# EAGLE board relay_brd (EAGLE 9.7.0)
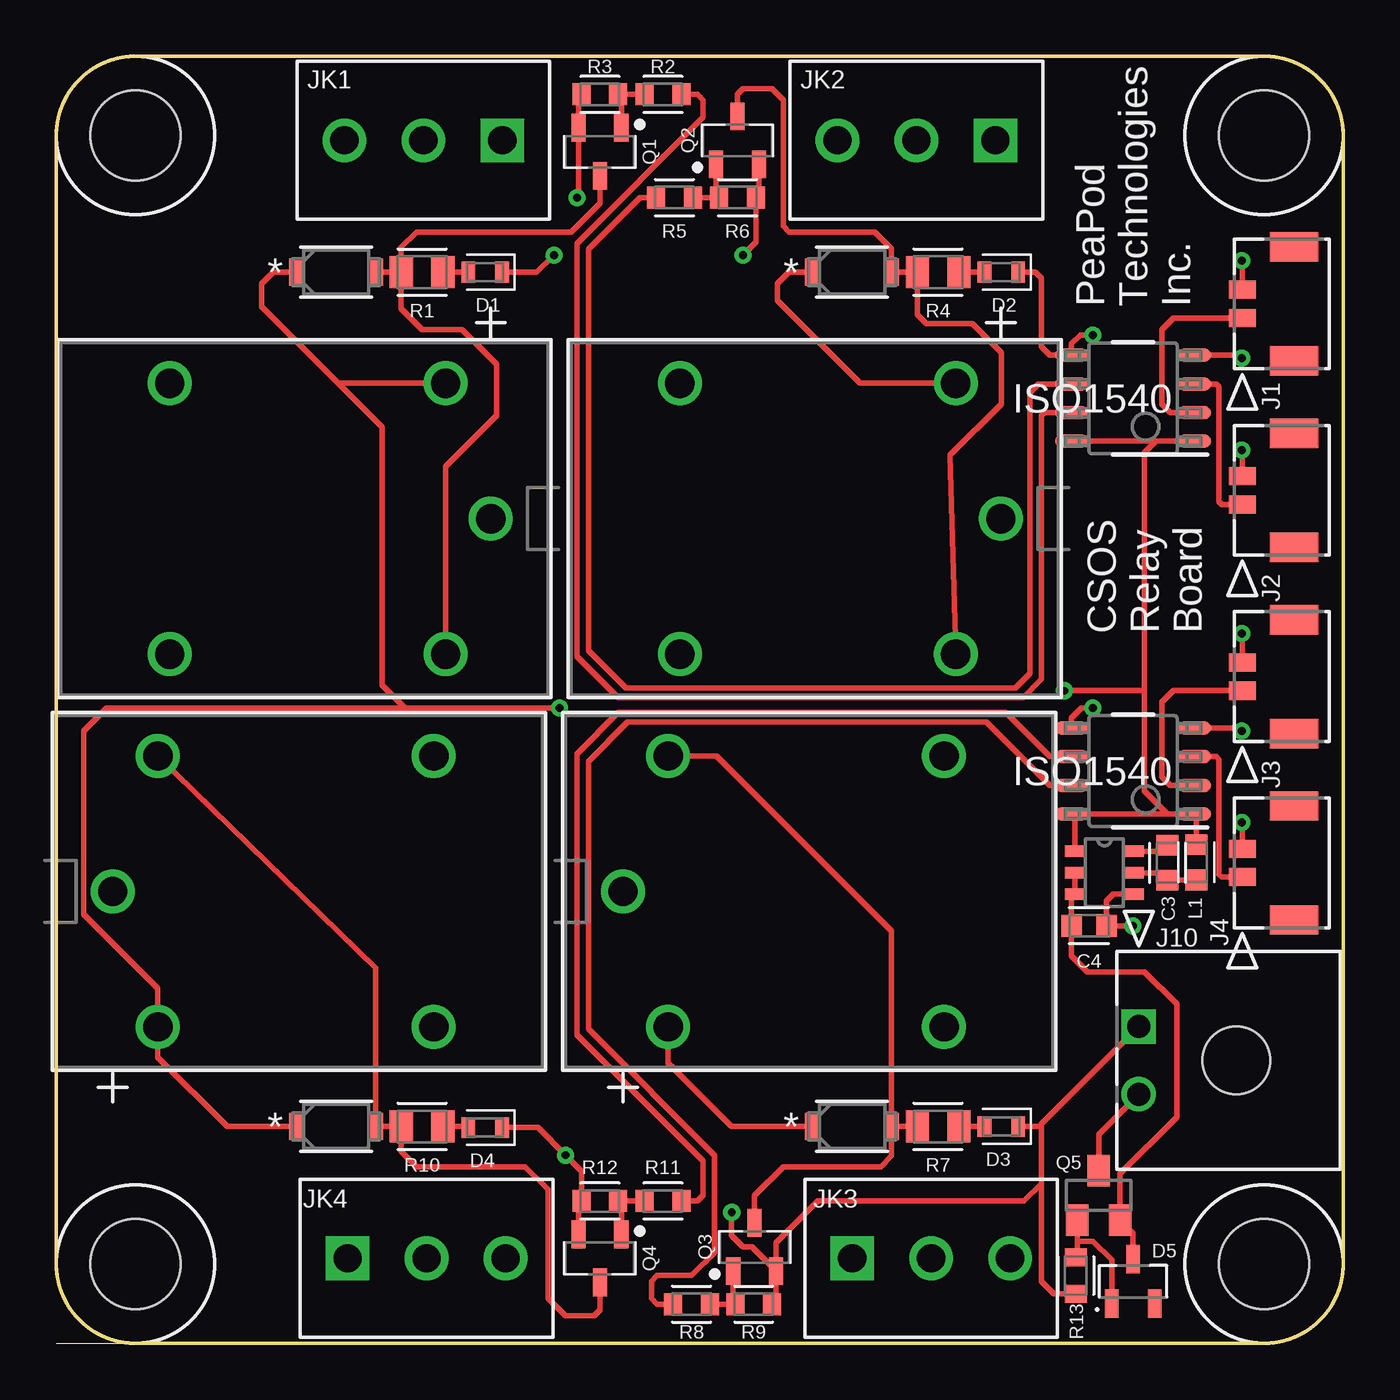
[diagram p0: board, top side]
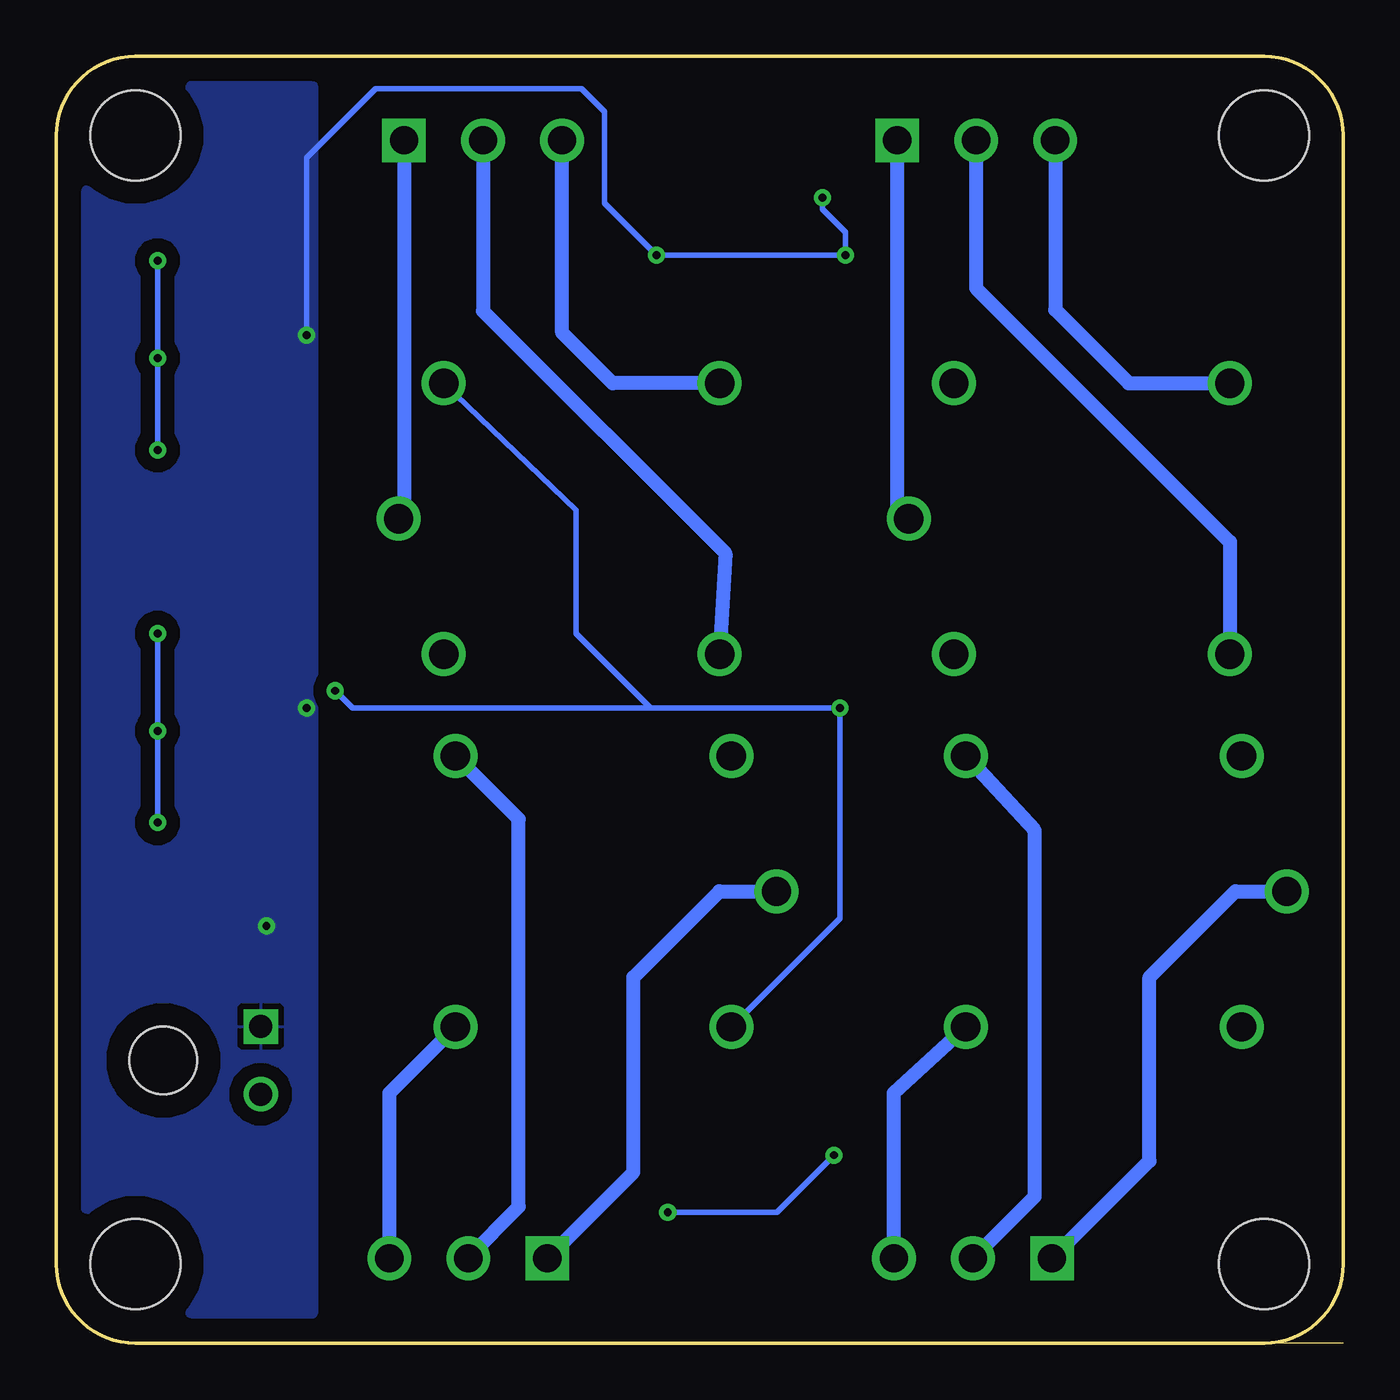
[diagram p1: board, bottom side, seen from below]

Size 57 x 57 mm. Coordinates in mm from the lower left corner, seen from the top.
Outline: 0,0 3.5,0
Outline: 53.5,57 18.48,57
Outline: 53.5,57 3.5,57 arc90 0,53.5 0,3.5 arc90 3.5,0
Outline: 53.5,57 arc-90 57,53.5 57,3.5 arc-90 53.5,0 3.5,0
Copper layers (1*16): Top / Bottom
Stack-up Default Layer Stack: Top User Defined 0.035mm / Dielectric-1 User Defined 1.5mm / Bottom User Defined 0.035mm
Design rules: minimum drill size 0.35mm, minimum copper width 6mil, keepout clearance 0mil, drill distance 6mil, dimension clearance 40mil, restrict clearance 0mil, copper clearance wire_polygon to wire_polygon 6mil, copper clearance wire_polygon to pad_smd 6mil, copper clearance wire_polygon to via 6mil, copper clearance pad_smd to pad_smd 6mil, copper clearance pad_smd to via 6mil, copper clearance via to via 6mil, copper clearance smd to pad (same net) 6mil, copper clearance smd to via (same net) 6mil, copper clearance smd to smd (same net) 6mil
Holes 4 mm at 3.5,3.5 3.5,53.5 53.5,53.5 53.5,3.5

## Footprints (pad centres in the part's own frame; a part is rotated, then mirrored left to right if it is on the bottom)
CAPC1608X85 = smd 0.921 x 0.97: 1 -0.775,0; 2 0.775,0
LEDC1608X55N_FLAT-R = smd 0.612 x 0.912: A 0.75,0; C -0.75,0
SOT95P230X110-3N = smd 0.59 x 1.26: 1 -0.95,-0.98; 2 0.95,-0.98; 3 0,0.98
CR_SOD-123FL_SME-L = smd 0.66 x 1.194: 1 -1.753,0; 2 1.753,0
2PIN = smd 0.8 x 1.2: 1 0,0; 2 -1.25,0 | smd 1.3 x 2.15: 3 1.9,2.295; 4 -3.15,2.295
2PIN' = drill 1.02 pad 1.52 square: 1 0,0 | drill 1.02 pad 1.52: 2 -3,0 | hole 2.997: -1.499,-4.318
TERM-3,5MM = drill 1.25 pad 1.93 square: P$1 0,0 | drill 1.25 pad 1.93: P$2 0,-3.5; P$3 0,-7
RELAY_G5LE-1_DC5_OMR = drill 1.3 pad 1.808: 1 0,16.5; 2 -6,14.5; 3 -6,2.278; 4 6,2.278; 5 6,14.5
INDC1608X95N = smd 0.9 x 0.97: 1 -0.785,0 | smd 0.933 x 0.97: 2 0.769,0
SOT95P237X112-3N = smd 1.224 x 0.625: 1 -1.064,0.95; 2 -1.064,-0.95; 3 1.064,0
SOT23 = smd 1 x 1.4: 1 -0.95,-1.1; 2 0.95,-1.1; 3 0,1.1
RESC2012X65 = smd 1.031 x 1.42: 1 -0.919,0; 2 0.919,0
RESC1608X60 = smd 0.799 x 0.974: 1 -0.815,0; 2 0.815,0
SOIC-8 = smd 1.45 x 0.6: 1 -2.725,1.905; 2 -2.725,0.635; 3 -2.725,-0.635; 4 -2.725,-1.905; 5 2.725,-1.905; 6 2.725,-0.635; 7 2.725,0.635; 8 2.725,1.905
AP63205 = smd 0.902 x 0.508: 1 -1.302,0.95; 2 -1.302,0; 3 -1.302,-0.95; 4 1.302,-0.95; 5 1.302,0; 6 1.302,0.95

## Placement (x,y rotation side)
C3  0.1uF  [CAPC1608X85]  49.22,21.28 90 top
C4  10uF  [CAPC1608X85]  45.75,18.49 0 top
D1  LED_RED  [LEDC1608X55N_FLAT-R]  18.99,47.44 180 top
D2  LED_RED  [LEDC1608X55N_FLAT-R]  41.85,47.44 180 top
D3  LED_RED  [LEDC1608X55N_FLAT-R]  41.85,9.6 180 top
D4  LED_RED  [LEDC1608X55N_FLAT-R]  18.99,9.55 180 top
D5  PLVA650A,215  [SOT95P230X110-3N]  47.7,2.74 0 top
FD1  1N4007FLCR  [CR_SOD-123FL_SME-L]  12.39,47.44 0 top
FD2  1N4007FLCR_SOD-123FL_SME-L  [CR_SOD-123FL_SME-L]  35.25,47.44 0 top
FD3  1N4007FLCR_SOD-123FL_SME-L  [CR_SOD-123FL_SME-L]  35.25,9.6 0 top
FD4  1N4007FLCR_SOD-123FL_SME-L  [CR_SOD-123FL_SME-L]  12.39,9.6 0 top
J1  [2PIN]  52.54,45.41 270 top
J2  [2PIN]  52.54,37.16 270 top
J3  [2PIN]  52.54,28.9 270 top
J4  [2PIN]  52.54,20.64 270 top
J10  VIN  [2PIN']  47.95,14.02 90 top
JK1  Relay 1  [TERM-3,5MM]  19.76,53.28 270 top
JK2  Relay 2  [TERM-3,5MM]  41.6,53.28 270 top
JK3  Relay 3  [TERM-3,5MM]  35.25,3.75 90 top
JK4  Relay 4  [TERM-3,5MM]  12.9,3.75 90 top
K1  G5LE-14_DC12RELAY_G5LE-1_DC5_OMR  [RELAY_G5LE-1_DC5_OMR]  2.74,36.52 270 top
K2  G5LE-15_DC5  [RELAY_G5LE-1_DC5_OMR]  25.34,36.52 270 top
K3  G5LE-14_DC12RELAY_G5LE-1_DC5_OMR  [RELAY_G5LE-1_DC5_OMR]  41.6,20.01 90 top
K4  G5LE-14_DC12RELAY_G5LE-1_DC5_OMR  [RELAY_G5LE-1_DC5_OMR]  18.99,20.01 90 top
L1  4.7uH  [INDC1608X95N]  50.49,21.29 270 top
Q1  MMBT2222A-7-F  [SOT95P237X112-3N]  24.07,52.78 270 top
Q2  NPN  [SOT95P237X112-3N]  30.17,53.28 90 top
Q3  NPN  [SOT95P237X112-3N]  30.93,4.26 90 top
Q4  NPN  [SOT95P237X112-3N]  24.07,3.75 270 top
Q5  SI01P10-TP  [SOT23]  46.17,6.55 0 top
R1  10k  [RESC2012X65]  16.2,47.44 180 top
R2  1k  [RESC1608X60]  26.87,55.32 0 top
R3  10k  [RESC1608X60]  24.07,55.32 0 top
R4  10k  [RESC2012X65]  39.06,47.44 180 top
R5  1k  [RESC1608X60]  27.38,50.74 180 top
R6  10k  [RESC1608X60]  30.17,50.74 180 top
R7  10k  [RESC2012X65]  39.06,9.6 180 top
R8  1k  [RESC1608X60]  28.14,1.72 180 top
R9  10k  [RESC1608X60]  30.89,1.72 180 top
R10  10k  [RESC2012X65]  16.2,9.6 180 top
R11  1k  [RESC1608X60]  26.87,6.29 0 top
R12  10k  [RESC1608X60]  24.07,6.29 0 top
R13  10k  [RESC1608X60]  45.16,2.99 90 top
U1  ISO1540  [SOIC-8]  47.7,41.85 180 top
U2  ISO1540  [SOIC-8]  47.7,25.34 180 top
U4  5V BUCK  [AP63205]  46.43,20.84 0 top

## Library data of the parts
C3 C4 = Capacitor; CATEGORY: Capacitor
D1-D4 = LED; CATEGORY: LED; COLOR: RED; DESCRIPTION: CHIP LED FLAT; SUB-CATEGORY: CHIP; TYPE: FLAT_TOP
D5 = PLVA650A_215; AVAILABILITY: Good; MF: NXP; MP: PLVA650A,215; PACKAGE: SOT95P230X110-3N; PRICE: $0.13 USD
FD1-FD4 = 2024-02-25_07-03-28_Library; COPYRIGHT: Copyright (C) 2024 Ultra Librarian. All rights reserved.; MANUFACTURER_PART_NUMBER: 1N4007FL; MFR_NAME: SMC Diode Solutions
J1-J4 = Molex Micro-Lock PLUS
J10 = Molex Micro-Fit; COPYRIGHT: Copyright (C) 2022 Ultra Librarian. All rights reserved.; MANUFACTURER_PART_NUMBER: 436500201; MFR_NAME: Molex Connector Corporation
JK1-JK4 = Screw Terminal (3.5mm)
K1-K4 = G5LE-14 DC3; COPYRIGHT: Copyright (C) 2022 Ultra Librarian. All rights reserved.; MANUFACTURER_PART_NUMBER: G5LE-14 DC12; MFR_NAME: Omron
L1 = Inductor; CATEGORY: Inductor; SUB-CATEGORY: Fixed
Q1-Q4 = Transistor; CATEGORY: Transistor; SUB-CATEGORY: BJT; TYPE: NPN
Q5 = Transistor; CATEGORY: Transistor; SUB-CATEGORY: MOSFET; TYPE: P-Channel
R1-R13 = Resistor; CATEGORY: Resistor; SUB-CATEGORY: Fixed
U1 U2 = ISO1540 I2C Isolator; COPYRIGHT: Copyright (C) 2022 Ultra Librarian. All rights reserved.; MANUFACTURER_PART_NUMBER: ISO1540DR; MFR_NAME: Texas Instruments; REFDES: RefDes; TYPE: TYPE
U4 = AP63205; COPYRIGHT: Copyright (C) 2022 Ultra Librarian. All rights reserved.; MANUFACTURER_PART_NUMBER: AP63205WU-7; MFR_NAME: Diodes Inc

## Nets
+5V: FD1.1 FD2.1 FD3.1 FD4.1 K1.2 K2.2 K3.2 K4.2 L1.1 U1.1 U1.8 U2.1 U2.8 U4.1
GND: C4.2 D1.C D2.C D3.C D4.C J10.1 Q1.2 Q2.2 Q3.2 Q4.2 R3.1 R6.1 R9.1 R12.1 R13.1 U1.5 U2.5 U4.4
N$1: JK1.P$3 K1.3
N$2: JK1.P$1 K1.1
N$3: JK1.P$2 K1.4
N$4: FD1.2 K1.5 Q1.3 R1.2
N$5: FD2.2 K2.5 Q2.3 R4.2
N$6: Q1.1 R2.1 R3.2
N$7: JK2.P$3 K2.3
N$8: R2.2 U1.7
N$9: J1.1 U1.2
N$10: J2.1 U1.3
N$11: J1.2 J2.2 U1.4
N$12: JK2.P$1 K2.1
N$13: FD4.2 K4.5 Q4.3 R10.2
N$14: FD3.2 K3.5 Q3.3 R7.2
N$15: Q2.1 R5.1 R6.2
N$16: JK2.P$2 K2.4
N$17: R5.2 U1.6
N$18: JK3.P$3 K3.3
N$19: JK3.P$1 K3.1
N$20: D2.A R4.1
N$21: D3.A R7.1
N$22: Q3.1 R8.1 R9.2
N$23: JK3.P$2 K3.4
N$24: J3.1 U2.2
N$25: R8.2 U2.7
N$26: J4.1 U2.3
N$27: J3.2 J4.2 U2.4
N$28: JK4.P$3 K4.3
N$29: JK4.P$1 K4.1
N$30: D1.A R1.1
N$31: D4.A R10.1
N$32: Q4.1 R11.1 R12.2
N$33: JK4.P$2 K4.4
N$34: R11.2 U2.6
N$36: C3.2 U4.6
N$37: C3.1 L1.2 U4.5
N$38: J10.2 Q5.3
N$39: C4.1 D5.3 Q5.2 U4.2 U4.3
N$40: D5.1 Q5.1 R13.2

## Tracks (layer width: path | path; a pad name or v marks a point on that pad's centre or on a via)
+5V  (via drill 0.35)
  Top 0.254: FD4.1 7.56,9.6 4.49,12.67 K4.2 4.49,15.71 1.22,18.99 1.22,27.12 2.24,28.14 15.44,28.14 | K3.2 27.1,12.41 29.92,9.6 FD3.1 | FD1.1 9.6,47.44 9.09,46.93 9.09,45.92 12.49,42.52 | 12.49,42.52 K1.2 | FD2.1 32.46,47.44 31.95,46.93 31.95,46.17 35.6,42.52 K2.2 | L1.1 50.49,23.37 U2.1 49.22,23.44 | U4.1 45.12,23.29 U2.8 49.22,23.44 | U1.8 48.71,39.95 | 48.71,39.95 U1.1 | 49.22,23.44 48.2,24.45 48.2,28.9 | 48.2,28.9 48.2,39.44 48.71,39.95 | 48.2,28.9 v44.65,28.9 | 15.44,28.14 v22.3,28.14 | 12.49,42.52 14.42,40.58 14.42,29.15 15.44,28.14
  Bottom 0.254: K3.2 22.3,18.81 v22.3,28.14 30.68,28.14 | K2.2 33.98,36.91 33.98,31.44 30.68,28.14 | v44.65,28.9 43.89,28.14 30.68,28.14
GND  (via drill 0.35)
  Top 0.254: D3.C 43.63,9.6 | D1.C 21.28,47.44 v22.04,48.2 | D4.C 21.33,9.55 v22.55,8.33 23.26,7.62 R12.1 23.12,6.16 Q4.2 23.26,4.95 | Q3.2 31.88,1.9 R9.1 | R3.1 23.12,55.18 Q1.2 23.12,50.81 v23.06,50.74 | Q2.2 31.12,50.88 R6.1 30.98,48.77 v30.42,48.2 | v45.92,44.65 45.35,44.65 44.97,44.27 U1.5 44.01,43.76 43.63,44.14 43.63,47.19 43.38,47.44 D2.C | U2.5 44.97,27.7 45.41,28.14 v45.92,28.14 | U4.4 46.81,19.89 46.52,19.6 C4.2 v47.7,18.49 | R13.1 44.19,2.18 43.63,2.74 43.63,7.06 | 43.63,7.06 43.63,9.6 | J10.1 43.63,9.7 43.63,9.6 | Q3.2 31.88,4.45 33.73,6.29 42.87,6.29 43.63,7.06 | Q3.2 30.82,4.26 30.42,4.26 29.92,4.77 v29.92,5.79
  Bottom 0.254: v29.92,5.79 25.09,5.79 v22.55,8.33 | v23.06,50.74 23.06,50.24 22.04,49.22 v22.04,48.2 v30.42,48.2 32.71,50.49 32.71,54.55 33.73,55.57 42.87,55.57 45.92,52.52 v45.92,44.65
  pour Bottom (isolate 0.61): 59.38,59.38 45.41,59.38 45.41,-4.12 59.38,-4.12 59.38,-1.58 59.38,-4.12
N$1
  Bottom 0.61: JK1.P$3 12.76,45.78 9.5,42.52 K1.3
N$2
  Bottom 0.61: JK1.P$1 19.76,37.04 K1.1
N$3
  Bottom 0.61: JK1.P$2 16.26,46.74 5.02,35.5 K1.4
N$4
  Top 0.254: FD1.2 R1.2 | R1.2 15.28,45.82 16.2,44.9 17.98,44.9 19.5,43.38 19.5,41.09 17.24,38.83 K1.5 | Q1.3 24.07,50.49 22.8,49.22 15.95,49.22 15.28,48.55 R1.2
N$5
  Top 0.254: K2.5 39.59,39.34 41.85,41.6 41.85,43.89 40.58,45.16 38.55,45.16 38.14,45.57 R4.2 FD2.2 37,48.48 36.27,49.22 32.46,49.22 32.2,49.47 32.2,55.06 31.69,55.57 30.42,55.57 30.17,55.32 Q2.3
N$6
  Top 0.254: Q1.1 25.02,55.18 R3.2 R2.1
N$7
  Bottom 0.61: K2.3 32.36,42.52 34.6,44.76 JK2.P$3
N$8
  Top 0.254: U1.7 43.76,41.22 43.63,41.09 43.63,29.41 42.83,28.61 24.88,28.61 23.06,30.42 23.06,48.71 28.65,54.3 28.65,55.06 28.39,55.32 R2.2
N$9
  Top 0.254: J1.1 49.47,45.41 48.97,44.9 48.97,41.6 49.35,41.22 U1.2
N$10
  Top 0.254: J2.1 51.63,37.16 51.51,37.28 51.51,42.36 51.38,42.49 U1.3
N$11  (via drill 0.35)
  Top 0.254: J1.2 52.54,47.93 v52.52,47.95 | v52.52,39.57 52.54,39.55 J2.2 | U1.4 52.4,43.76 v52.52,43.63
  Bottom 0.254: v52.52,47.95 v52.52,43.63 v52.52,39.57
N$12
  Bottom 0.61: JK2.P$1 41.6,36.53 K2.1
N$13
  Top 0.254: K4.5 14.14,16.62 FD4.2 R10.2 15.28,8.48 15.95,7.82 20.77,7.82 21.79,6.8 21.79,1.98 22.55,1.22 23.82,1.22 24.07,1.47 Q4.3
N$14
  Top 0.254: FD3.2 R7.2 | FD3.2 37,18.26 29.25,26.01 K3.5 | Q3.3 30.93,6.55 32.2,7.82 36.52,7.82 37,8.3 FD3.2
N$15
  Top 0.254: Q2.1 29.22,50.88 R6.2 R5.1
N$16
  Bottom 0.61: JK2.P$2 38.1,45.72 27.37,34.99 K2.4
N$17
  Top 0.254: U1.6 43.51,42.49 43.12,42.11 43.12,29.66 42.47,29.01 25.23,29.01 23.57,30.68 23.57,48.46 25.85,50.74 R5.2
N$18
  Bottom 0.61: JK3.P$3 42.25,11.08 K3.3
N$19
  Bottom 0.61: JK3.P$1 31.44,7.56 31.44,16.2 27.63,20.01 K3.1
N$20
  Top 0.254: R4.1 D2.A
N$21
  Top 0.254: R7.1 D3.A
N$22
  Top 0.254: Q3.1 29.98,1.81 R9.2 R8.1
N$23
  Bottom 0.61: JK3.P$2 38.75,3.81 36.52,6.04 36.52,23.21 K3.4
N$24
  Top 0.254: J3.1 49.47,28.9 48.97,28.39 48.97,25.09 49.35,24.71 U2.2
N$25
  Top 0.254: U2.7 44.01,24.71 41.2,27.52 25.31,27.52 23.57,25.77 23.57,13.91 29.15,8.33 29.15,4.01 28.14,2.99 26.61,2.99 26.36,2.74 26.36,1.98 26.61,1.72 R8.2
N$26
  Top 0.254: J4.1 51.63,20.64 51.51,20.77 51.51,25.85 51.38,25.98 U2.3
N$27  (via drill 0.35)
  Top 0.254: J3.2 52.54,31.42 v52.52,31.44 | v52.52,23.06 52.54,23.04 J4.2 | U2.4 52.4,27.25 v52.52,27.12
  Bottom 0.254: v52.52,31.44 v52.52,27.12 v52.52,23.06
N$28
  Bottom 0.61: JK4.P$3 19.9,11.08 K4.3
N$29
  Bottom 0.61: JK4.P$1 8.58,8.07 8.58,16.2 4.77,20.01 K4.1
N$30
  Top 0.254: R1.1 D1.A
N$31
  Top 0.254: R10.1 18.2,9.6 D4.A
N$32
  Top 0.254: R11.1 R12.2 25.02,6.16 Q4.1
N$33
  Bottom 0.61: JK4.P$2 13.66,6.49 13.66,22.7 K4.4
N$34
  Top 0.254: U2.6 44.01,25.98 42.07,27.93 24.89,27.93 23.06,26.09 23.06,13.66 28.65,8.07 28.65,6.55 28.39,6.29 R11.2
N$36
  Top 0.254: U4.6 48.95,21.79 C3.2
N$37
  Top 0.254: L1.2 49.24,20.53 C3.1 48.89,20.84 U4.5
N$38
  Top 0.254: Q5.3 46.17,9.24 J10.2
N$39
  Top 0.254: D5.3 47.7,4.87 Q5.2 47.12,7.5 49.63,10 49.63,15.03 48.2,16.45 45.66,16.45 44.97,17.15 C4.1 44.97,19.74 U4.3 U4.2
N$40
  Top 0.254: Q5.1 45.22,4.52 | 45.22,4.52 45.22,3.87 R13.2 | D5.1 46.75,3.69 45.92,4.52 45.22,4.52

## Text on the board
SilkscreenTop: PeaPod / Technologies / Inc. | CSOS / Relay / Board